# EAGLE board TorqueSens v4 (EAGLE 9.3.2)
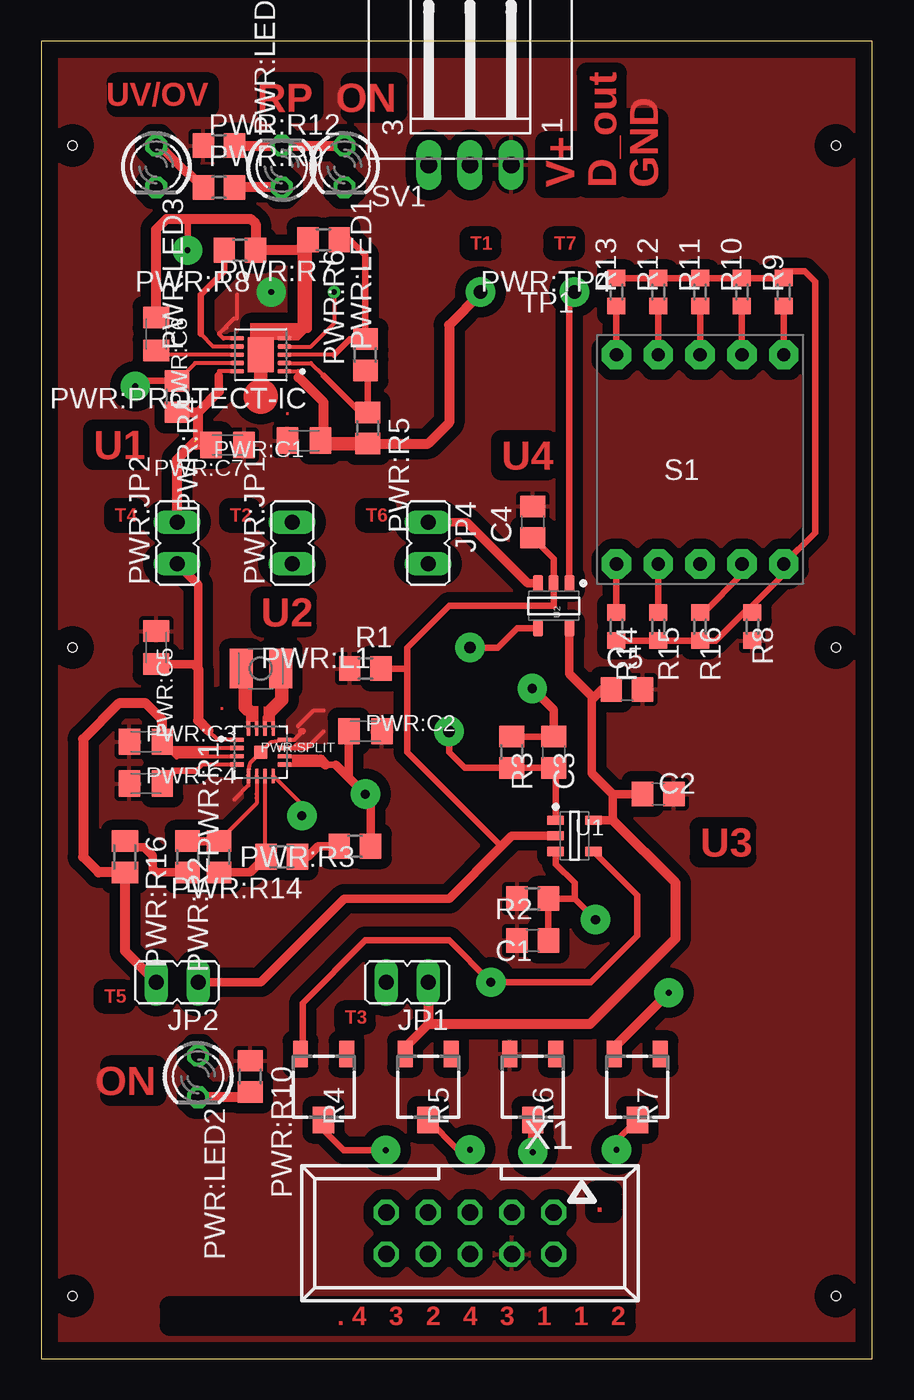
[diagram p0: board, top side]
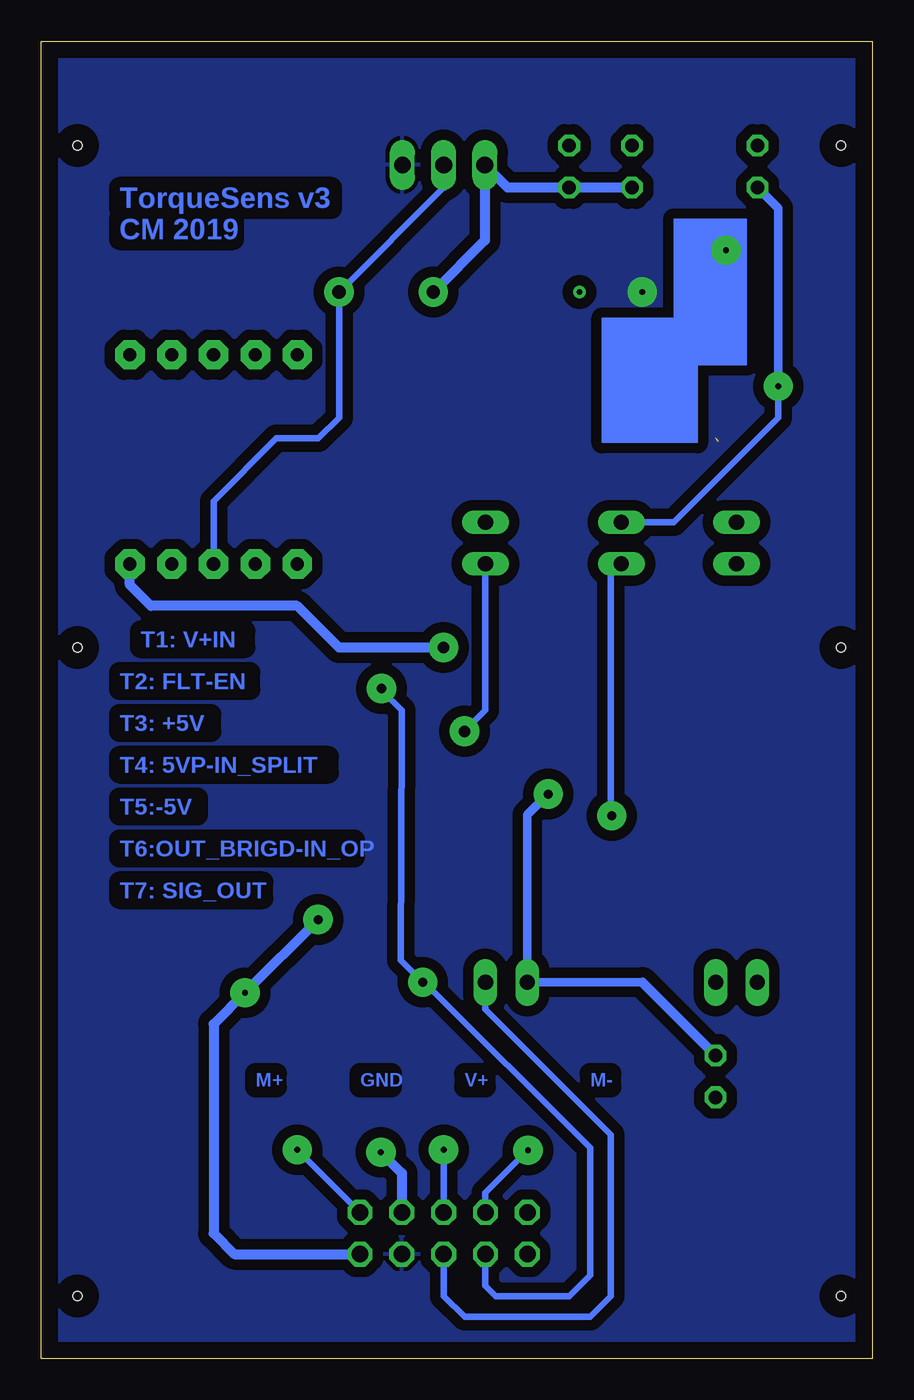
[diagram p1: board, bottom side, seen from below]

Size 50.47 x 80 mm. Coordinates in mm from the lower left corner, seen from the top.
Outline: 0,0 50.47,0 50.47,80 0,80 0,0
Copper layers (1*16): Top 0.035mm / dielectric 1.5mm / Bottom 0.035mm
Design rules "default *": minimum track width 8mil, minimum drill 0.35mm, track to track 25mil, track to pad 25mil, pad to pad 8mil, via to via 20mil, smd to smd 8mil, copper to edge 40mil, drill to drill 40mil, minimum pad ring 10mil, minimum via ring 8mil, stop-mask expansion 4mil, vias tented up to drill 0mil, thermal gap 10mil
Net classes: 0 default: width 0.254 mm, clearance 0.205 mm
Holes 0.55 mm at 1.91,73.66 48.26,73.66 48.26,3.81 1.91,3.81 1.91,43.18 48.26,43.18

## Footprints (pad centres in the part's own frame; a part is rotated, then mirrored left to right if it is on the bottom)
C0805 = smd 1.3 x 1.5: 1 -0.95,0; 2 0.95,0
JP1 = drill 0.914 long: 1 0,-1.27; 2 0,1.27
C0805K = smd 1.3 x 1.6: 1 -1,0; 2 1,0
L2825P = smd 1.4 x 2.4: 1 -1.2,0; 2 1.2,0
LED3MM = drill 0.813 octagon: A -1.27,0; K 1.27,0
SON50P300X300X100-11N = smd 0.86 x 0.26: 1 -1.435,1; 2 -1.435,0.5; 3 -1.435,0; 4 -1.435,-0.5; 5 -1.435,-1; 6 1.435,-1; 7 1.435,-0.5; 8 1.435,0; 9 1.435,0.5; 10 1.435,1 | smd 1.6 x 2.15: 11 0,0
R0805 = smd 1.3 x 1.5: 1 -0.95,0; 2 0.95,0
M0805 = smd 1.3 x 1.6: 1 -0.95,0; 2 0.95,0
QFN50P300X300X80-17N = smd 0.88 x 0.26: 1 -1.435,0.75; 2 -1.435,0.25; 3 -1.435,-0.25; 4 -1.435,-0.75; 9 1.435,-0.75; 10 1.435,-0.25; 11 1.435,0.25; 12 1.435,0.75 | smd 0.26 x 0.88: 5 -0.75,-1.435; 6 -0.25,-1.435; 7 0.25,-1.435; 8 0.75,-1.435; 13 0.75,1.435; 14 0.25,1.435; 15 -0.25,1.435; 16 -0.75,1.435 | smd 0.8 x 0.8: 17 0,0
B1,27 = smd 1.27 x 1.27: TP 0,0
3223J = smd 1.6 x 0.9: 1 -2,1.4; 3 -2,-1.4 | smd 1.6 x 1.3: 2 2,0
R0603 = smd 1 x 1.1: 1 -0.85,0; 2 0.85,0
SW_SS-10-15SPE = drill 0.8 pad 1.778 octagon: 1 -5.08,6.35; 2 -2.54,6.35; 3 2.54,6.35; 4 5.08,6.35; 5 5.08,-6.35; 6 2.54,-6.35; 7 0,-6.35; 8 -2.54,-6.35; 9 -5.08,-6.35; C 0,6.35
L03P = drill 1.016 long: 1 2.5,-6.25; 2 0,-6.25; 3 -2.5,-6.25
LINEAR_TECHNOLOGY_LTC2050IS5_0 = smd 1 x 0.55: 1 -1.15,0.95; 2 -1.15,0; 3 -1.15,-0.95; 4 1.15,-0.95; 5 1.15,0.95
TI_NATIONAL_SEMICONDUCTOR_LMP7707MF-NOPB_1 = smd 1 x 0.6: 1 -1.375,0.95; 2 -1.375,0; 3 -1.375,-0.95; 4 1.375,-0.95; 5 1.375,0.95
057-010-1 = drill 1 octagon: 1 -5.08,-1.27; 2 -5.08,1.27; 3 -2.54,-1.27; 4 -2.54,1.27; 5 0,-1.27; 6 0,1.27; 7 2.54,-1.27; 8 2.54,1.27; 9 5.08,-1.27; 10 5.08,1.27

## Placement (x,y rotation side)
C1  0.1uF  [C0805]  29.85,25.4 180 top
C2  0.1uF  [C0805]  37.47,34.29 0 top
C3  0.1uF  [C0805]  31.11,36.83 270 top
C4  [C0805]  29.85,50.8 90 top
C5  [C0805]  35.56,40.64 0 top
JP1  [JP1]  22.22,22.86 90 top
JP2  [JP1]  8.25,22.86 90 top
JP4  [JP1]  23.5,49.53 180 top
PWR:C1  1uF  [C0805K]  15.95,55.75 180 top
PWR:C2  4.7uF  [C0805K]  19.68,38.1 0 top
PWR:C3  4.7uF  [C0805K]  6.35,37.46 0 top
PWR:C4  100nF  [C0805K]  6.35,34.92 0 top
PWR:C5  10uF  [C0805K]  6.99,43.18 270 top
PWR:C6  10nF  [C0805K]  6.99,62.23 270 top
PWR:C7  10uF  [C0805K]  11.32,55.48 180 top
PWR:JP1  [JP1]  15.24,49.53 0 top
PWR:JP2  [JP1]  8.25,49.53 0 top
PWR:L1  2.2uH  [L2825P]  13.34,41.91 0 top
PWR:LED1  [LED3MM]  18.41,72.39 270 top
PWR:LED2  [LED3MM]  9.52,17.14 270 top
PWR:LED3  [LED3MM]  6.99,72.39 270 top
PWR:LED4  [LED3MM]  14.61,72.39 90 top
PWR:PROTECT-IC  [SON50P300X300X100-11N]  13.34,60.96 180 top
PWR:R1  120k  [R0805]  10.8,30.48 90 top
PWR:R2  470k  [R0805]  8.89,30.48 270 top
PWR:R3  330K  [R0805]  19.05,31.11 180 top
PWR:R4  100k  [R0805]  8.25,58.42 270 top
PWR:R5  120k  [R0805]  19.82,56.52 270 top
PWR:R6  6.8k  [R0805]  19.68,60.96 90 top
PWR:R7  33k  [R0805]  17.14,67.95 180 top
PWR:R8  22k  [R0805]  12.07,67.31 180 top
PWR:R9  120k  [R0805]  10.8,71.12 0 top
PWR:R10  200  [R0805]  12.7,17.14 270 top
PWR:R12  200  [R0805]  10.8,73.66 0 top
PWR:R14  2.2K  [M0805]  14.61,30.48 180 top
PWR:R16  2.2K  [M0805]  5.08,30.48 270 top
PWR:SPLIT  TPS65135TPS65135  [QFN50P300X300X80-17N]  13.34,36.83 0 top
PWR:TP4  PTR1B1,27  [B1,27]  26.67,64.77 0 top
R1  350  [R0805]  19.68,41.91 0 top
R2  18.2k  [R0805]  29.85,27.94 180 top
R3  18.2k  [R0805]  28.57,36.83 270 top
R4  [3223J]  17.14,16.51 270 top
R5  [3223J]  23.5,16.51 270 top
R6  [3223J]  29.85,16.51 270 top
R7  [3223J]  36.2,16.51 270 top
R8  18.2k  [R0603]  43.18,44.45 270 top
R9  18.2k  [R0603]  45.09,64.77 90 top
R10  18.2k  [R0603]  42.55,64.77 90 top
R11  18.2k  [R0603]  40.01,64.77 90 top
R12  18.2k  [R0603]  37.47,64.77 90 top
R13  18.2k  [R0603]  34.93,64.77 90 top
R14  18.2k  [R0603]  34.93,44.45 270 top
R15  18.2k  [R0603]  37.47,44.45 270 top
R16  18.2k  [R0603]  40.01,44.45 270 top
S1  SS-10-15SPE  [SW_SS-10-15SPE]  40.01,54.61 180 top
SV1  [L03P]  26.04,78.74 0 top
TP1  PTR1B1,27  [B1,27]  32.39,64.77 180 top
U1  LINEAR_TECHNOLOGY_LTC2050IS5LINEAR_TECHNOLOGY_LTC2050IS5_0_0  [LINEAR_TECHNOLOGY_LTC2050IS5_0]  32.39,31.75 0 top
U2  TI_NATIONAL_SEMICONDUCTOR_LMP7707MF-NOPBTI_NATIONAL_SEMICONDUCTOR_LMP7707MF-NOPB_0_1  [TI_NATIONAL_SEMICONDUCTOR_LMP7707MF-NOPB_1]  31.11,45.72 270 top
X1  057-010-1  [057-010-1]  26.04,7.62 180 top

## Library data of the parts
C1-C5 PWR:R1-PWR:R10 PWR:R12 R1-R3 R8-R16 = rcl
JP1 JP2 JP4 PWR:JP1 PWR:JP2 = jumper
PWR:C1-PWR:C7 = rcl; SPICEPREFIX: C
PWR:L1 = rcl; SPICEPREFIX: L
PWR:LED1-PWR:LED4 = led
PWR:PROTECT-IC = SON50P300X300X100-11N
PWR:R14 PWR:R16 = rcl; SPICEPREFIX: R
PWR:SPLIT = QFN50P300X300X80-17N
PWR:TP4 TP1 = testpad
R4-R7 = pot
S1 = SS-10-15SPE; AVAILABILITY: Unavailable; DESCRIPTION: Switch Rotary SP Screwdriver PC Pins 0.1A 5VDC Plastic Bag; MF: Nidec Copal; MP: SS-10-15SPE; PACKAGE: None; PRICE: None
SV1 = con-amp-mt; OC_FARNELL: unknown; OC_NEWARK: unknown
U1 = Linear Technology - LTC2050IS5; CHANNELS_: 1; CIIVA_IDS: 8827709; CODE__JEDEC: MO-193; COMPONENT_LINK_1_DESCRIPTION: Manufacturer URL; COMPONENT_LINK_1_URL: http://www.linear.com/; COMPONENT_LINK_3_DESCRIPTION: Package Specification; COMPONENT_LINK_3_URL: http://cds.linear.com/docs/en/packaging/SOT_5_05-08-1635.pdf; DATASHEET: http://cds.linear.com/docs/en/datasheet/2050fc.pdf; DATASHEET_VERSION: Rev C; FOOTPRINT_VARIANT_NAME_0: Level C; FOOTPRINT_VARIANT_NAME_1: Level B; FOOTPRINT_VARIANT_NAME_2: Level A; GBW_MHZ_TYPICAL: 3; IMPORTED: yes; IMPORTED_FROM: vault; IMPORT_TS: 1521848410; IS_MA_TYPICAL: 0.8; LINEAR_TECHNOLOGY_PART_NUMBER: LTC2050; MF: Linear Technology; MOUNTING_TECHNOLOGY: Surface Mount; MPN: LTC2050IS5; PACKAGE: LT-S5-5-TSOT-23; PACKAGE_DESCRIPTION: 5-Lead Plastic TSOT-23, Body 1.63 x 2.90 mm, Pitch 0.95 mm; PREFIX: U; RELEASE_DATE: 1378745203; SR_VUS_TYPICAL: 2; TYPE: ZD; VAULT_GUID: 8555B049-ED4F-4380-B7FA-2379FF4543B7; VAULT_REVISION: DA8BFDE5-EBAF-4C16-8E03-9404D310B1D4; VOS_MV_TYPICAL: 0.0005; VS_MAX_V: 6; VS_MIN_V: 2.7
U2 = NOPB; CIIVA_IDS: 1322878; COMPONENT_LINK_1_DESCRIPTION: Datasheet URL; COMPONENT_LINK_1_URL: http://www.ti.com/general/docs/lit/getliterature.tsp?genericPartNumber=LMP7707&fileType=pdf; COMP_TYPE: Amplifiers; FOOTPRINT_VARIANT_NAME_0: Level C; FOOTPRINT_VARIANT_NAME_1: Level B; FOOTPRINT_VARIANT_NAME_2: Level A; IMPORTED: yes; IMPORTED_FROM: vault; IMPORT_TS: 1521865583; MF: TI National Semiconductor; MPN: LMP7707MF/NOPB; PACKAGE_DESCRIPTION: Molded SOT-23, .115 x .063 x .040 in Body, 5 Lead, .0375 in Pitch; PACKAGE_REFERENCE: DBV0005A; PACKAGE_TOP_MARKING: AH4A*XTT; PIN_COUNT: 5; POWER_WISE: Y; PREFIX: U; RELEASE_DATE: 1464069256; ROHS: Yes; VAULT_GUID: D2A2C10E-6A8E-42CA-BB51-102401FD650E; VAULT_REVISION: 935156D0-10AB-4BAD-9D3C-6DAEB643FFBC
X1 = con-panduit; OC_FARNELL: unknown; OC_NEWARK: unknown

## Nets
GND: C1.2 C2.2 C4.2 C5.2 PWR:C1.2 PWR:C2.2 PWR:C3.1 PWR:C4.1 PWR:C5.1 PWR:C7.1 PWR:PROTECT-IC.6 PWR:R10.1 PWR:R12.1 PWR:SPLIT.5 PWR:SPLIT.11 PWR:SPLIT.12 R1.1 R2.2 R6.3 R8.2 SV1.1 X1.4
M+: C1.1 R2.1 R7.3 U1.3 X1.2
M-: C3.1 R3.1 R4.3 U1.4 X1.8
N$1: R4.2 X1.7
N$2: R9.1 S1.9
N$3: R8.1 R9.2 R10.2 R11.2 R12.2 R13.2 R14.2 R15.2 R16.2 S1.1 U2.4
N$4: R5.2 X1.5
N$5: R10.1 S1.8
N$6: R6.2 X1.3
N$7: R11.1 S1.7
N$8: R7.2 X1.1
N$9: JP4.1 U2.3
N$11: R12.1 S1.6
N$12: R13.1 S1.5
N$13: R14.1 S1.4
N$14: R15.1 S1.3
N$15: R16.1 S1.2
OUT-BRIDGE: C3.2 JP4.2 R3.2 U1.1
OUTAMP: S1.C SV1.2 TP1.TP U2.1
PWR:FLT: PWR:JP1.2 PWR:LED3.K PWR:PROTECT-IC.9 PWR:R4.1
PWR:N$1: PWR:PROTECT-IC.2 PWR:R5.1 PWR:R6.1
PWR:N$2: PWR:L1.1 PWR:SPLIT.15 PWR:SPLIT.16
PWR:N$3: PWR:L1.2 PWR:SPLIT.13 PWR:SPLIT.14
PWR:N$4: PWR:C6.2 PWR:PROTECT-IC.8
PWR:N$5: PWR:R1.1 PWR:R14.2 PWR:SPLIT.7
PWR:N$6: PWR:LED3.A PWR:R9.1
PWR:N$8: PWR:C4.2 PWR:SPLIT.4
PWR:N$9: PWR:PROTECT-IC.7 PWR:R8.2
PWR:N$10: PWR:LED2.K PWR:R10.2
PWR:N$14: PWR:PROTECT-IC.4
PWR:N$15: PWR:JP1.1 PWR:SPLIT.8
PWR:N$16: PWR:C7.2 PWR:JP2.2 PWR:PROTECT-IC.10 PWR:R4.2
PWR:N$17: PWR:LED1.A PWR:LED4.K PWR:R12.2
PWR:N$18: PWR:R3.2 PWR:R14.1
PWR:N$21: PWR:R1.2 PWR:R2.1 PWR:SPLIT.6
PWR:N$22: PWR:R2.2 PWR:R16.1
PWR:OVP: PWR:PROTECT-IC.3 PWR:R6.2 PWR:R7.1
PWR:RTN_LINE: PWR:C6.1 PWR:PROTECT-IC.5 PWR:PROTECT-IC.11 PWR:R7.2 PWR:R8.1
PWR:VOUT-VIN: PWR:C5.2 PWR:JP2.1 PWR:SPLIT.1
V+IN: PWR:C1.1 PWR:LED1.K PWR:LED4.A PWR:PROTECT-IC.1 PWR:R5.2 PWR:R9.2 PWR:TP4.TP SV1.3
V+OUT: C2.1 C5.1 JP1.1 R5.3 U1.5 U2.5 X1.6
V+OUT_SPLIT: JP1.2 PWR:C2.1 PWR:LED2.A PWR:R3.1 PWR:SPLIT.9 PWR:SPLIT.10
V-OUT: C4.1 JP2.1 R1.2 U1.2 U2.2
V-OUT_SPLIT: JP2.2 PWR:C3.2 PWR:R16.2 PWR:SPLIT.2 PWR:SPLIT.3

## Tracks (layer width: path | path; a pad name or v marks a point on that pad's centre or on a via)
GND  (via drill 0.35 pad 1.78)
  Top 0.254: 11.9,64.61 11.9,63.17 11.72,63.17 11.25,62.7 11.25,62.61 11.17,62.61 10.8,62.23 11.07,61.96 PWR:PROTECT-IC.6 | 15.88,38.1 15.36,37.58 PWR:SPLIT.12 13.97,37.46 12.7,36.2 arc16 PWR:SPLIT.5 12.59,34.81 11.75,33.97 | 15.58,38.39 16.56,39.37 17.14,39.37 | PWR:SPLIT.11 15.35,37.08 16.12,37.08 16.32,37.28 17.14,38.1
  Top 0.305: 15.35,37.08 15.54,37.28 16.32,37.28
  Top 0.406: 15.88,38.1 15.79,38.1
  other vias: 13.97,64.77
  pour Bottom: 0,80.01 50.17,80.01 50.17,0 0,0
  pour Top: 0,80.01 50.17,80.01 50.17,0 0,0
M+  (via drill 0.35 pad 1.78, 0.55 pad 1.78)
  Top 0.406: C1.1 R2.1 32.39,27.94 | 32.39,27.94 32.39,28.89 31.23,30.04 U1.3 | 32.39,27.94 v33.66,26.67
  Top 0.61: R7.3 34.93,18.64 34.93,19.05 v38.1,22.22
  Bottom 0.61: v33.66,26.67 v38.1,22.22 40.01,20.32 40.01,7.62 38.73,6.35 X1.2
M-  (via drill 0.55 pad 1.78)
  Top 0.406: 15.67,18.58 R4.3 15.88,18.64 15.88,21.59 19.68,25.4 24.77,25.4 v27.3,22.86 33.36,22.86 36.2,25.7 36.2,28.14 U1.4 | C3.1 R3.1
  Top 0.508: 29.87,40.64 v29.81,40.7 31.11,39.39 C3.1
  Bottom 0.406: v29.81,40.7 29.81,40.6 28.57,39.37 28.57,38.1 28.63,24.19 v27.3,22.86 27.2,22.86 17.14,12.8 17.14,5.08 18.41,3.81 22.86,3.81 23.5,4.45 X1.8
N$1  (via drill 0.35 pad 1.78)
  Top 0.406: R4.2 17.14,13.87 18.36,12.65 18.38,12.66 v20.91,12.66
  Bottom 0.406: v20.91,12.66 23.5,10.08 X1.7
N$2
  Top 0.406: R9.1 S1.9
N$3  (via drill 0.7 pad 1.8)
  Top 0.406: R16.2 R15.2 R14.2 | R13.2 R12.2 R11.2 R10.2 R9.2 45.09,66.04 46.36,66.04 46.99,65.41 46.99,50.16 S1.1 45.09,47.62 43.18,45.72 R8.1 42.65,45.3 40.95,43.6 R16.2 | 39.37,43.6 R16.2 | U2.4 28.89,44.34 27.73,43.18 v26.04,43.18
  Bottom 0.61: v26.04,43.18 32.39,43.18 34.93,45.72 43.82,45.72 45.09,46.99 S1.1
N$4  (via drill 0.35 pad 1.78)
  Top 0.406: v26.04,12.7 25.3,12.7 R5.2
  Bottom 0.406: v26.04,12.7 X1.5
N$5
  Top 0.406: R10.1 S1.8
N$6  (via drill 0.35 pad 1.78)
  Top 0.61: R6.2 v29.85,12.54
  Bottom 0.61: v29.85,12.54 28.57,11.27 X1.3
N$7
  Top 0.406: R11.1 S1.7
N$8  (via drill 0.35 pad 1.78)
  Top 0.406: R7.2 34.93,13.24 v34.93,12.7
  Bottom 0.406: v34.93,12.7 X1.1
N$9
  Top 0.508: U2.3 29.53,47.09 25.82,50.8 JP4.1
N$11
  Top 0.406: R12.1 S1.6
N$12
  Top 0.406: R13.1 S1.5
N$13
  Top 0.406: S1.4 R14.1
N$14
  Top 0.406: S1.3 R15.1
N$15
  Top 0.406: R16.1 40.22,45.3 42.55,47.62 S1.2
OUT-BRIDGE  (via drill 0.7 pad 1.8)
  Top 0.406: v24.77,38.1 24.77,36.83 25.71,35.88 R3.2 C3.2 31.23,35.76 U1.1
  Bottom 0.406: v24.77,38.1 23.5,39.37 JP4.2
OUTAMP  (via drill 0.8 pad 1.78)
  Top 0.406: TP1.TP 32.07,64.45 U2.1
  Bottom 0.406: 26,71.16 TP1.TP 32.39,57.15 33.66,55.88 36.2,55.88 40.01,52.07 S1.C
  Bottom 0.508: SV1.2 26.04,71.2 26,71.16
  other vias: 32.39,64.77
PWR:FLT  (via drill 0.35 pad 1.78)
  Top 0.254: PWR:PROTECT-IC.9 9.34,60.46 PWR:R4.1
  Top 0.406: PWR:R4.1 5.72,59.37 v5.72,59.05
  Bottom 0.406: PWR:JP1.2 12.07,50.8 5.72,57.15 v5.72,59.05
  Bottom 0.508: PWR:LED3.K 5.72,69.85 v5.72,59.05
PWR:N$1
  Top 0.254: PWR:PROTECT-IC.2 16.38,60.46 17.14,59.69
  Top 0.406: 17.14,59.69 19.37,57.47 PWR:R5.1 19.82,59.87
  Top 0.61: PWR:R6.1 19.82,59.87
PWR:N$2
  Top 0.254: PWR:SPLIT.16 12.59,39.37 | PWR:SPLIT.15 13.09,38.87 12.75,39.21
  Top 0.508: 12.32,39.63 12.51,39.45 12.59,39.37 12.75,39.21
  Top 0.813: PWR:L1.1 12.39,41.65 12.39,39.56 12.51,39.45
PWR:N$3
  Top 0.254: PWR:SPLIT.14 13.59,38.98 13.97,39.37 14.09,39.48 | PWR:SPLIT.13 14.09,39.48 | 14.09,39.48 14.61,40.01
  Top 0.813: PWR:L1.2 arc-90 14.61,41.84 14.61,40.01 13.97,39.37
PWR:N$4
  Top 0.203: 6.99,60.96 PWR:C6.2
  Top 0.254: PWR:PROTECT-IC.8 6.99,60.96
PWR:N$5
  Top 0.254: PWR:R14.2 13.59,30.55 PWR:SPLIT.7
  Top 0.406: PWR:R1.1 11.43,29.53
  Top 0.508: PWR:R14.2 12.71,29.53 PWR:R1.1
PWR:N$6
  Top 0.508: PWR:R9.1 8.94,72.02 8.83,72.02 7.19,73.66 PWR:LED3.A
PWR:N$8
  Top 0.254: PWR:SPLIT.4 9.77,36.08 9.39,35.7
  Top 0.406: 9.39,35.7 8.12,35.7 PWR:C4.2
PWR:N$9
  Top 0.254: PWR:PROTECT-IC.7 10.46,61.46 9.68,62.23
  Top 0.406: PWR:R8.2 11.11,66.04 9.68,64.61 9.68,62.23
PWR:N$10
  Top 0.61: PWR:R10.2 12.38,15.88 PWR:LED2.K
PWR:N$14  (via drill 0.35)
  Top 0.254: v17.78,64.77 17.78,62.87 16.38,61.46 PWR:PROTECT-IC.4
PWR:N$15  (via drill 0.55 pad 1.78)
  Top 0.254: PWR:SPLIT.8 15.88,33.61 15.88,33.02 v15.83,32.98
  Bottom 0.406: PWR:JP1.1 15.88,47.62 15.88,33.02 v15.83,32.98
PWR:N$16  (1 unrouted)
  Top 0.254: PWR:PROTECT-IC.10 10.8,59.96 10.8,59.69
  Top 0.406: 9.65,57.47 9.52,57.47
  Top 0.508: 10.8,59.69 10.8,58.74
  Top 0.61: PWR:R4.2 9.52,57.47 | PWR:JP2.2 8.25,54.61 9.32,55.68 9.39,55.48 PWR:C7.2 | 9.52,55.88 9.52,57.47 | 10.8,58.74 9.52,57.47
PWR:N$17
  Top 0.61: PWR:R12.2 PWR:LED4.K PWR:LED1.A
PWR:N$18
  Top 0.508: PWR:R3.2 16.83,31.11 16.2,30.48 PWR:R14.1
PWR:N$21
  Top 0.254: PWR:SPLIT.6 13.09,34.29 13.09,34.04 13.09,33.72 PWR:R1.2
  Top 0.406: PWR:R1.2 11.17,31.81
  Top 0.508: PWR:R1.2 PWR:R2.1
PWR:N$22
  Top 0.508: PWR:R2.2 6.98,29.53 6.77,29.74 6.77,30.55 6.25,31.07 5.44,31.07 PWR:R16.1
PWR:OVP
  Top 0.254: 17.78,60.96 PWR:PROTECT-IC.3
  Top 0.406: PWR:R7.1 18.73,67.95 19.68,66.99 PWR:R6.2 18.73,61.91 17.78,60.96
PWR:RTN_LINE  (via drill 0.35 pad 1.78)
  Top 0.254: 16.2,62.55 15.61,61.96 PWR:PROTECT-IC.5 13.7,61.96 13.34,61.59 PWR:PROTECT-IC.11
  Top 0.406: 8.89,69.22 v8.89,67.31
  Top 0.508: 15.56,67.31 PWR:R7.2 16.2,62.55
  Top 0.61: 15.56,67.31 PWR:R8.1 13.02,68.9 12.7,69.22 8.89,69.22 7.62,69.22 6.99,68.58 PWR:C6.1
  Top 0.813: PWR:PROTECT-IC.11 13.34,58.42
PWR:VOUT-VIN
  Top 0.254: PWR:SPLIT.1 10.71,37.58 10.15,38.15
  Top 0.508: PWR:C5.2 9.25,42.18 9.52,41.91 9.52,46.99 PWR:JP2.1
  Top 0.61: 9.52,41.91 9.52,38.77 10.15,38.15
V+IN  (via drill 0.8 pad 1.78)
  Top 0.254: PWR:PROTECT-IC.1 15.61,59.96 15.64,59.93 15.64,59.58
  Top 0.406: 17.4,55.57 PWR:C1.1 17.2,55.76
  Top 0.61: PWR:TP4.TP 26.67,64.66 24.77,62.76 24.77,56.84 23.5,55.57 PWR:R5.2 | 17.14,55.82 17.14,58.07 15.64,59.58 | PWR:LED4.A PWR:R9.2
  Top 0.813: PWR:R5.2 17.4,55.57 | PWR:C1.1 17.14,55.82
  Bottom 0.61: PWR:TP4.TP 23.54,67.91 SV1.3 22.16,71.12 PWR:LED1.K PWR:LED4.A
  other vias: 26.67,64.77
V+OUT
  Top 0.508: R5.3 22.07,18.53 22.07,18.9 23.5,20.32 | U1.5 34.71,32.7 34.71,34.29 | 36.3,34.29 C2.1 34.71,34.29 | 32.07,41.91 32.07,41.59 33.44,40.22 33.44,40.01 | 32.07,41.91 U2.5 | 32.07,41.91 | 33.44,40.01 33.44,35.56 34.71,34.29 | 33.44,40.01 34.08,40.64 C5.1
  Top 0.61: JP1.1 23.5,20.32 33.31,20.32 38.52,25.53 38.52,28.89 34.71,32.7
  Bottom 0.406: JP1.1 23.5,21.23 15.88,13.61 15.88,3.81 17.14,2.54 24.77,2.54 26.04,3.81 X1.6
V+OUT_SPLIT  (via drill 0.55 pad 1.78)
  Top 0.254: PWR:SPLIT.9 17.26,36.08 | PWR:SPLIT.10 16.76,36.58 16.96,36.38 17.14,36.2
  Top 0.406: 17.26,36.08 17.89,36.08
  Top 0.508: v19.68,34.29 18.68,35.29 PWR:C2.1 | v19.68,34.29 20,33.98 PWR:R3.1 | 17.89,36.08 v19.68,34.29
  Top 0.61: 17.26,36.08 16.96,36.38
  Bottom 0.508: v19.68,34.29 20.95,33.02 JP1.2 13.97,22.86
  Bottom 0.61: 13.97,22.86 PWR:LED2.A
V-OUT
  Top 0.406: 27.94,31.11 22.22,36.83 22.22,41.91 | 22.22,41.91 22.22,43.18 24.77,45.72 31.11,45.72 U2.2 31.11,48.58 C4.1 | R1.2 22.22,41.91
  Top 0.508: U1.2 28.57,31.75 27.94,31.11 24.77,27.94 18.41,27.94 13.34,22.86 JP2.1
V-OUT_SPLIT
  Top 0.254: 8.23,36.58 PWR:SPLIT.3 | PWR:SPLIT.2 7.74,37.08 PWR:C3.2
  Top 0.406: PWR:C3.2 8.23,36.58
  Top 0.61: PWR:C3.2 7.35,38.8 6.35,39.8 4.72,39.8 2.54,37.62 2.54,30.48 3.49,29.53 PWR:R16.2 5.08,24.77 JP2.2
(copper drawn outside any net)
  shapes: Bottom area x2, Top area x7, Top circle x1

## Text on the board
Top: UV/OV | RP | ON | V+ | D_out | GND | T1 | T7 | . | U1 | U4 | T4 | T2 | T6 | U2 | . | U3 | T5 | T3 | ON | . | . 4 3 2 4 3 1 1 2
Bottom: TorqueSens v3 | CM 2019 | T1: V+IN | T2: FLT-EN | T3: +5V | T4: 5VP-IN_SPLIT | T5:-5V | T6:OUT_BRIGD-IN_OP | T7: SIG_OUT | M- | V+ | GND | M+